# Altium PCB ADAS_ECU_MB_revA.PcbDoc (part 1 of 5)
Units mm, origin at the board's own origin, x right, y up, seen from the top; angles counter-clockwise.
Board outline 180 x 120 mm, 6 copper layers (Top Layer, Mid Layer 1, Mid Layer 2, Mid Layer 3, Mid Layer 4, Bottom Layer), stack 1.554 mm thick; 452 components, 370 nets, 4018 pads, 80 vias.
Unrouted connection lines stored in the file: 869.
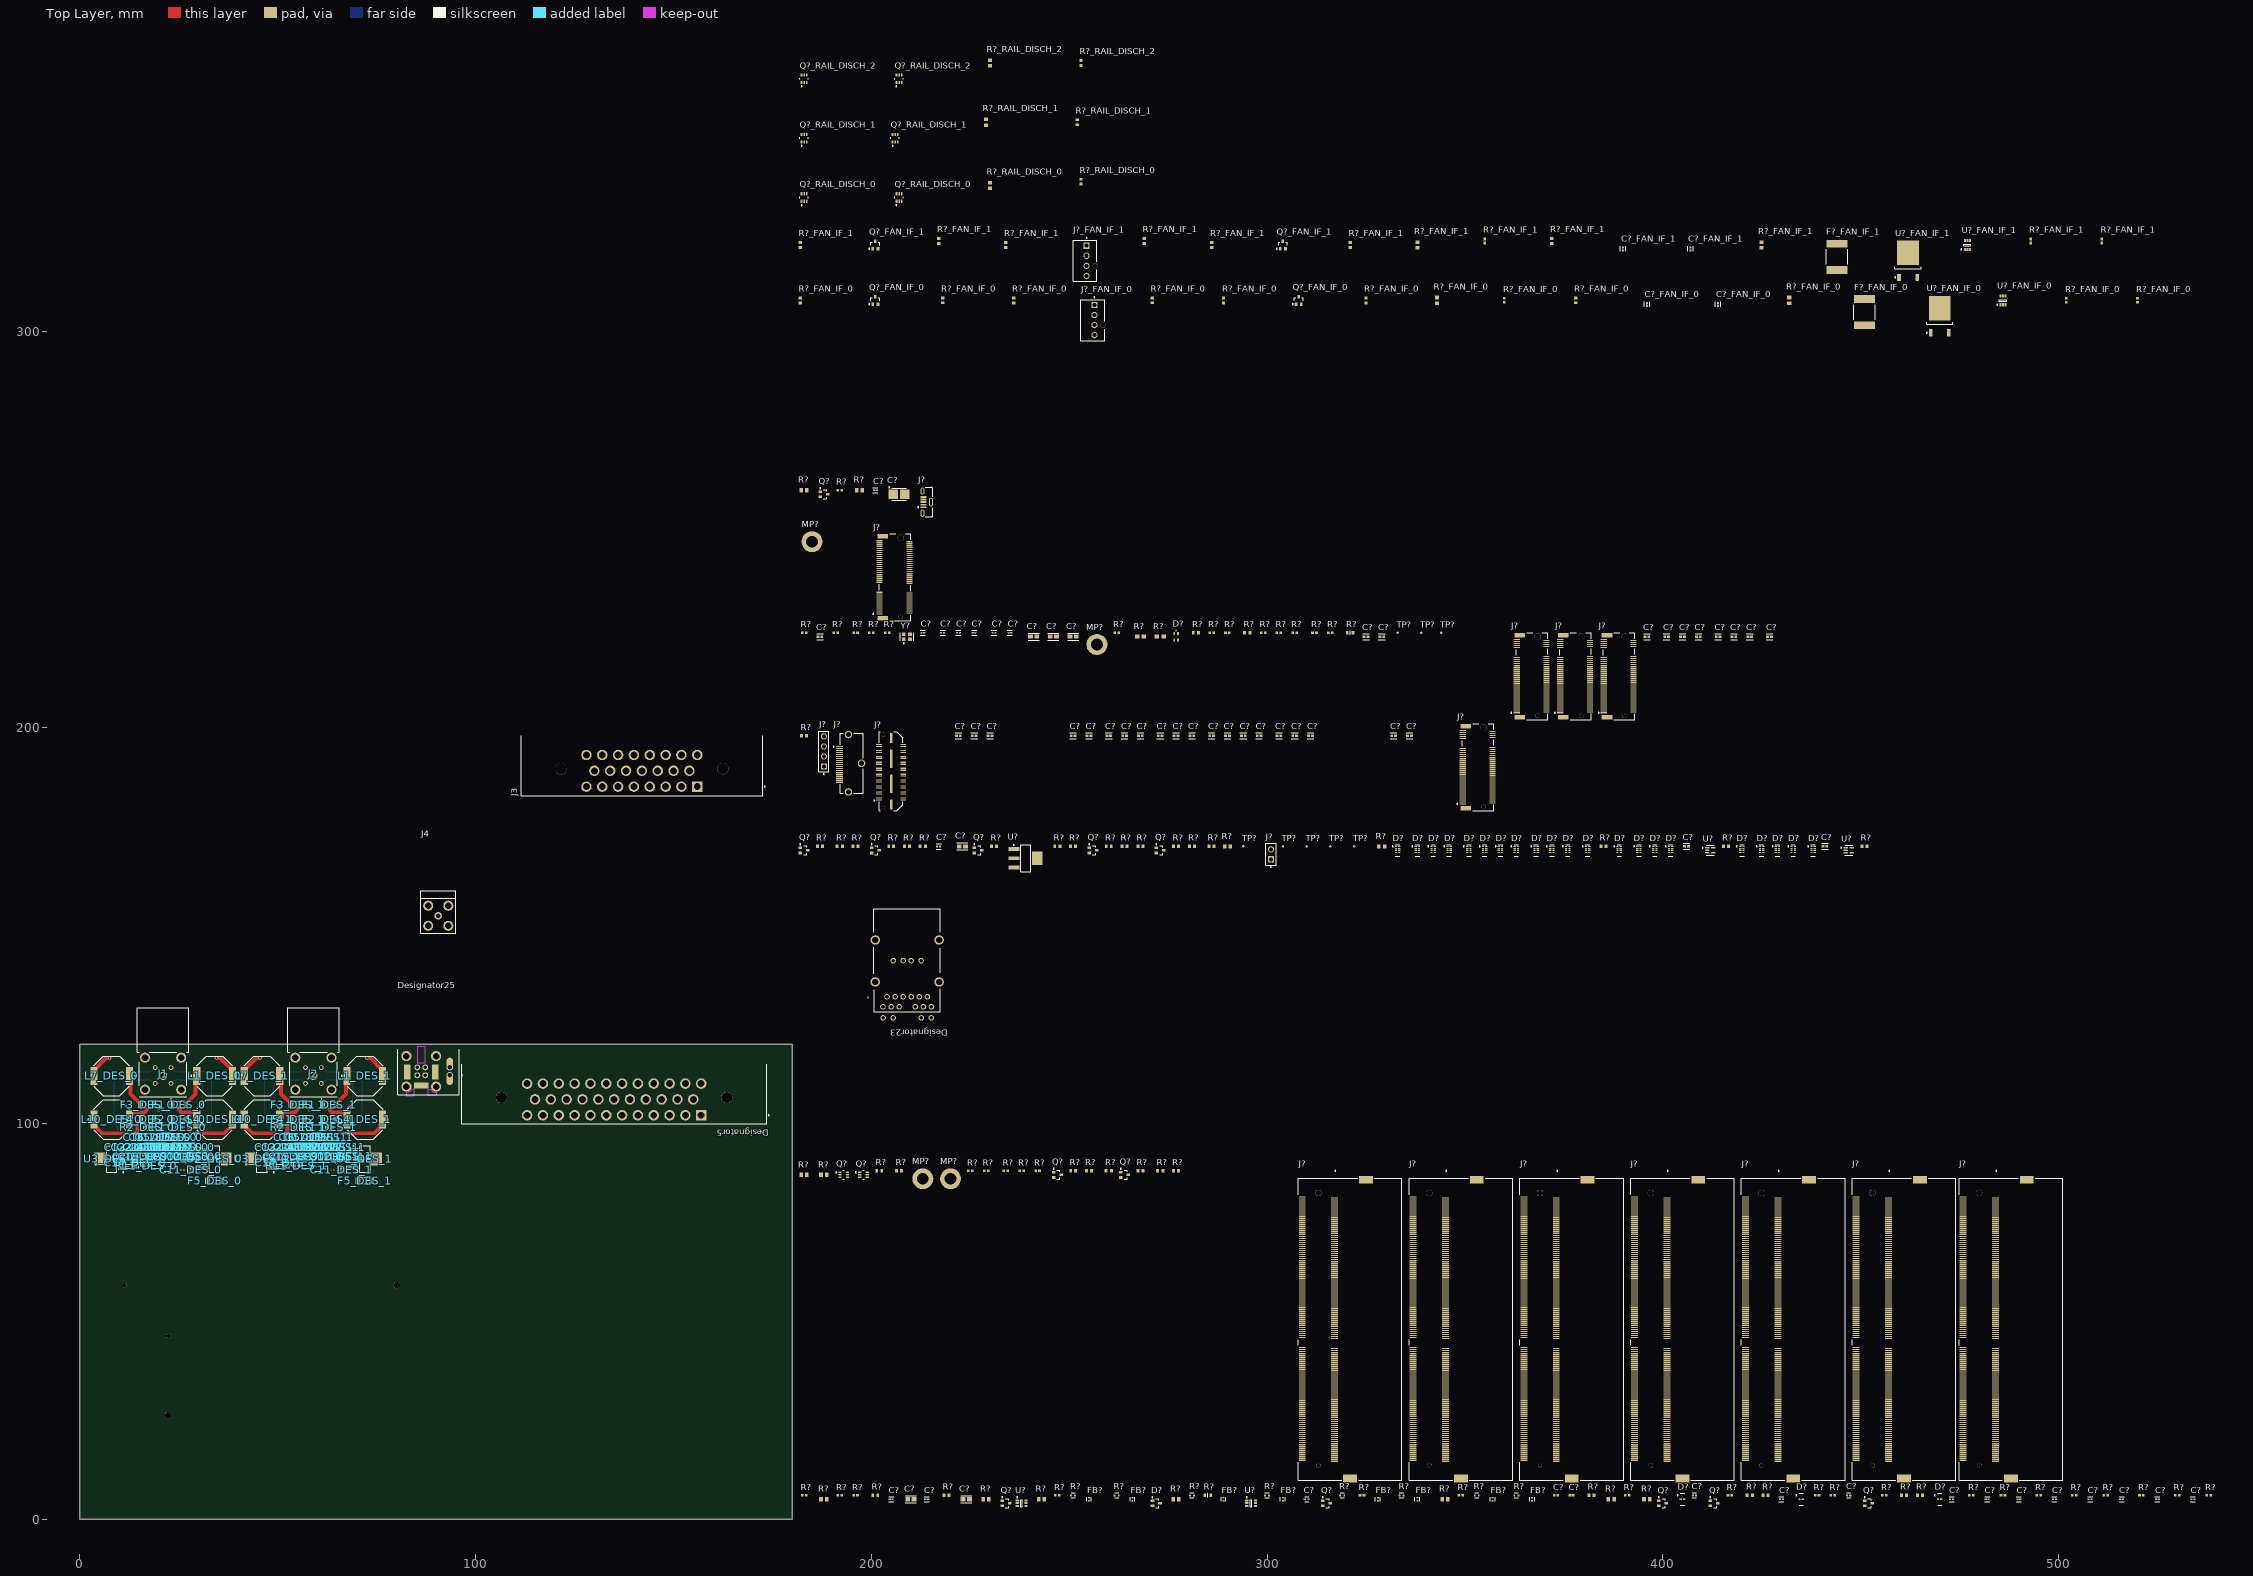
[diagram p0: Top Layer view]
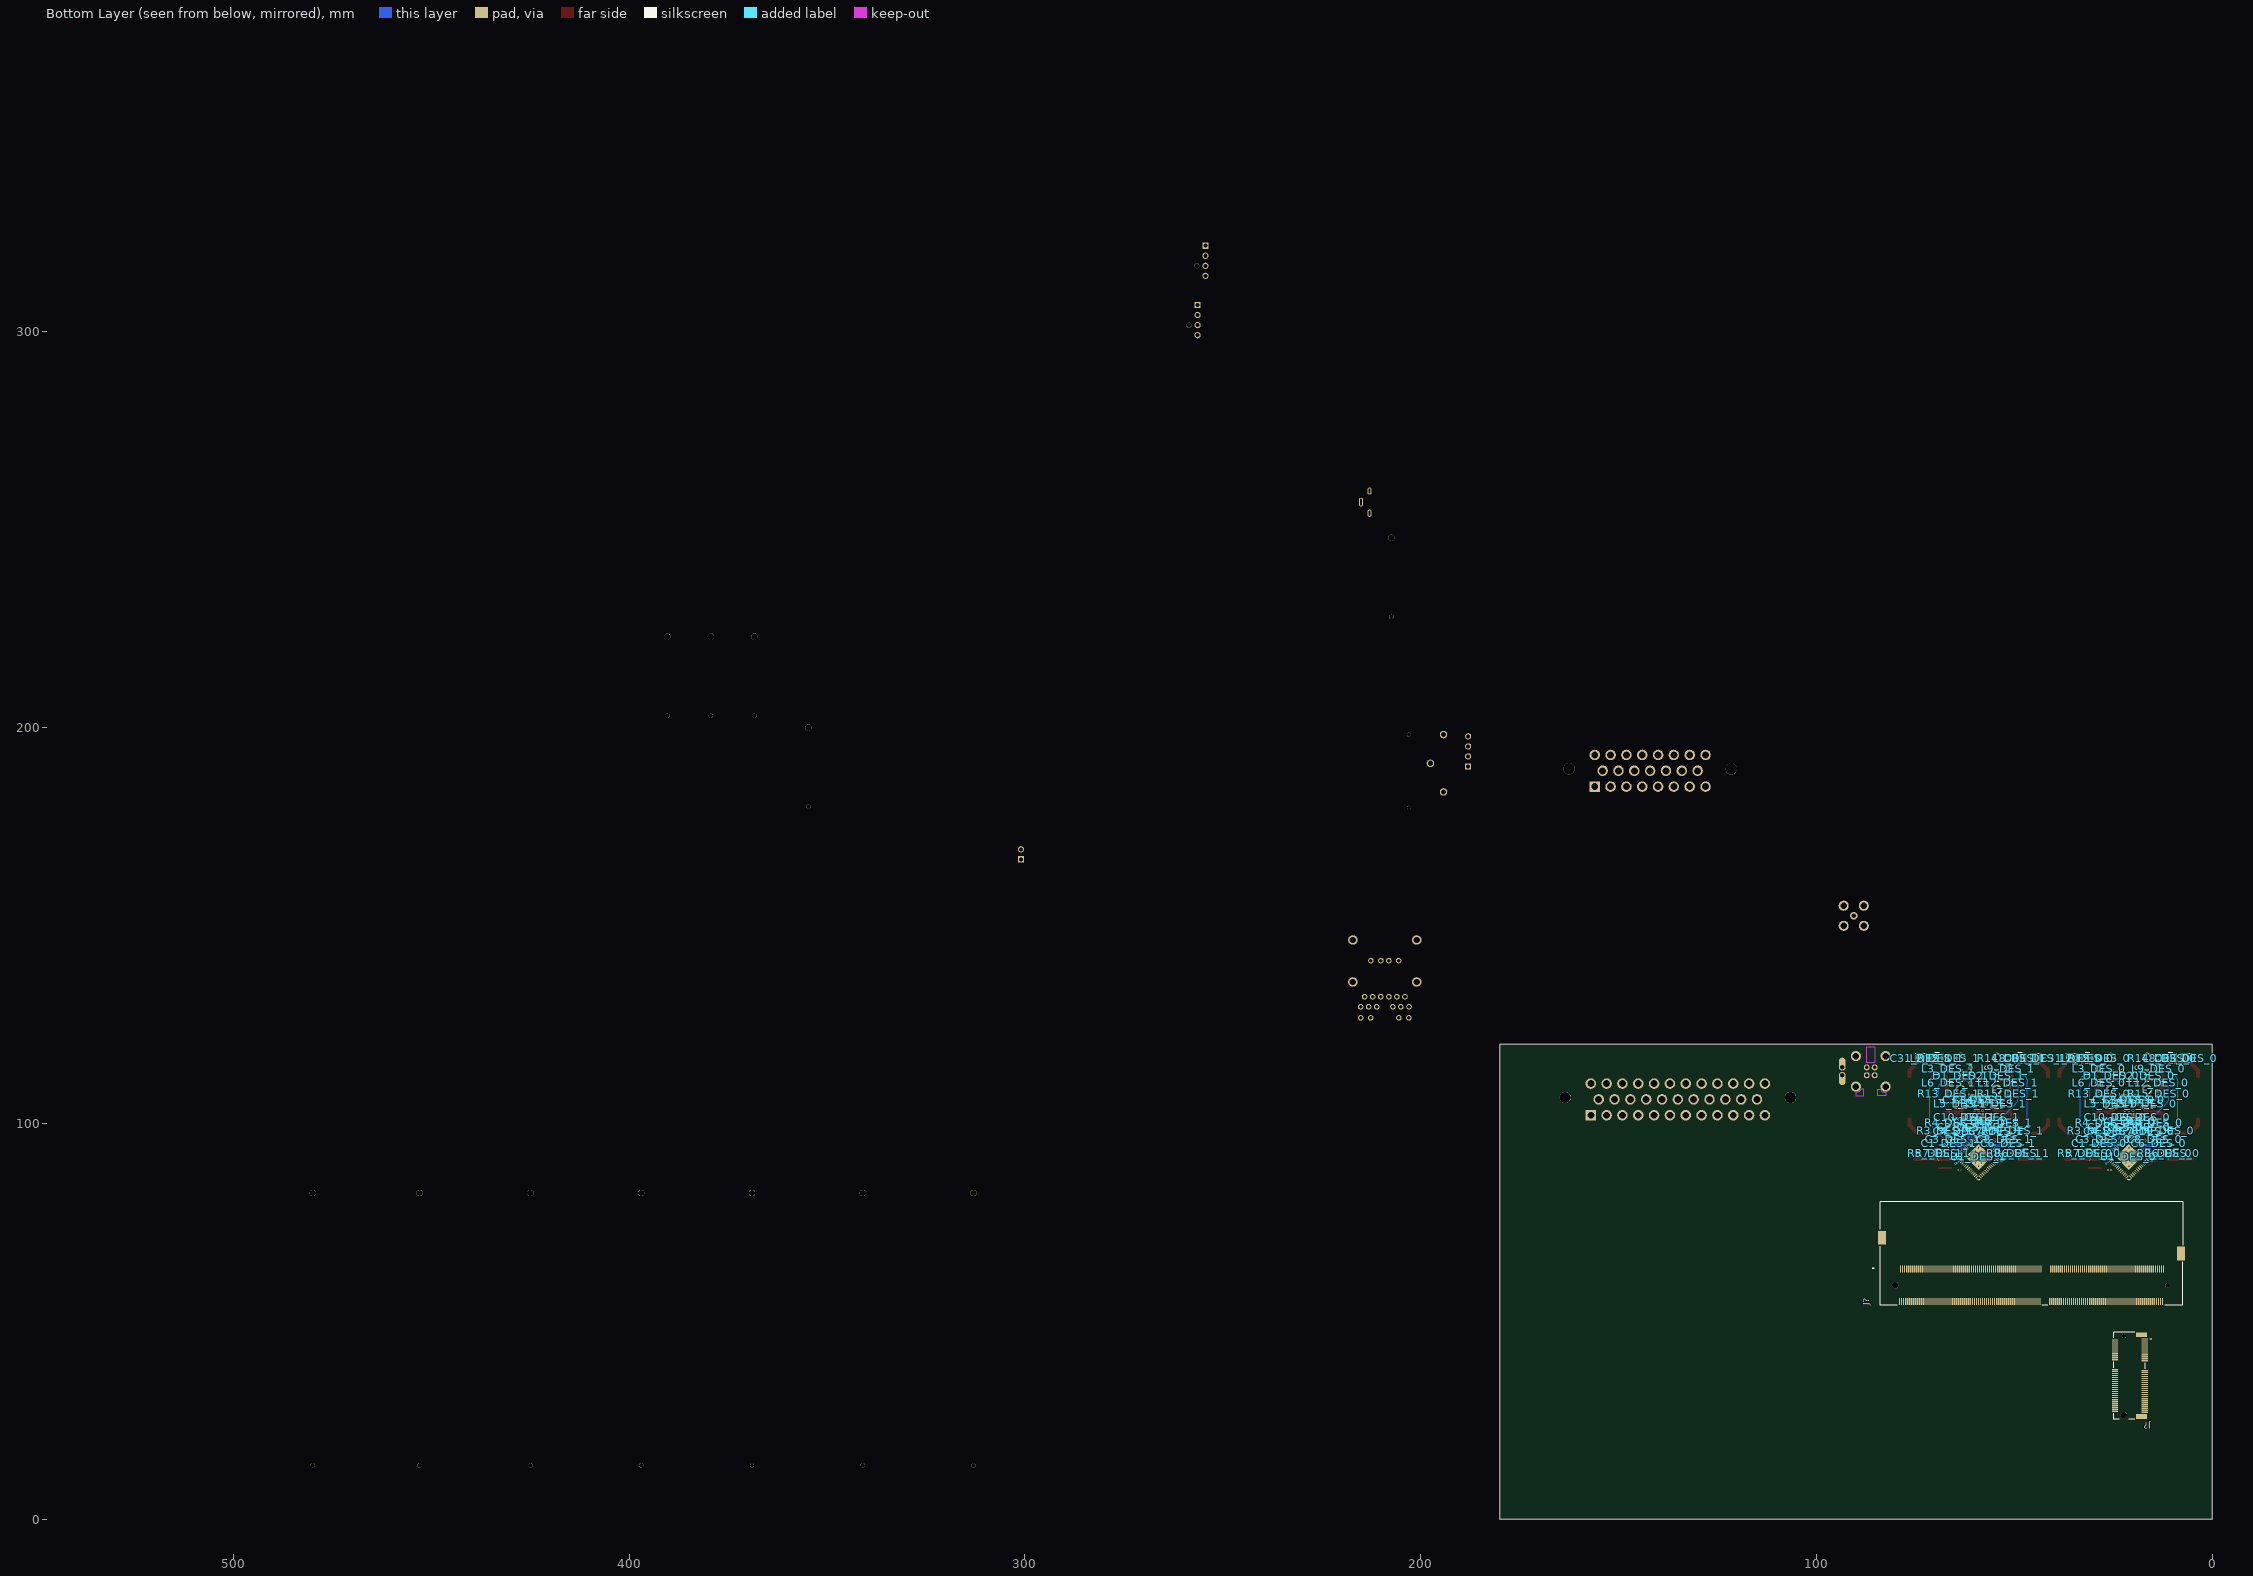
[diagram p1: Bottom Layer view, seen from below]

## Layer stack, top to bottom
Top Solder: solder mask 0.0127, Solder Resist, Dk 3.8
Top Layer: signal copper 0.035
Dielectric 1: prepreg 0.2104, 2313, Dk 4.05
Mid Layer 1: signal copper 0.0152
Core 1: core 0.4, FR-4, Dk 4.5
Mid Layer 2: signal copper 0.0152
Dielectric 2: prepreg 0.2028, 2116, Dk 4.25
Mid Layer 3: signal copper 0.0152
Core 2: core 0.4, FR-4, Dk 4.5
Mid Layer 4: signal copper 0.0152
Dielectric 3: prepreg 0.2104, 2313, Dk 4.05
Bottom Layer: signal copper 0.035
Bottom Solder: solder mask 0.0127, Solder Resist, Dk 3.8

## Board outline
0,0 180,0 180,120 0,120

## Design rules (kind name [scope] priority, off if disabled: settings)
BoardOutlineClearance [All] p1: gap=0.2 ignorepadtopadclearanceinfootprint=FALSE
Clearance [All] p1: gap=0.089 ignorepadtopadclearanceinfootprint=FALSE except(0.127: Arc-Via Track-Via SMDPad-Via THPad-Via Via-Via Via-Fill Via-Poly Via-Region Via-Text; 0.25: Arc-Hole Track-Hole SMDPad-Hole THPad-Hole Via-Hole Fill-Hole Poly-Hole Region-Hole Text-Hole)
ComponentClearance [All] p1: gap=0.089 collisioncheckmode=3 verticalgap=0.089 showdistances=TRUE
DiffPairsRouting 100DIFF [InDifferentialPairClass('100DIFF')] p1: maxlimit=0.2 minlimit=0.127 mostfreqgap=0.127 toplayer_mingap=0.2 toplayer_prefgap=0.2 toplayer_minwidth=0.163 toplayer_maxwidth=0.163 toplayer_prefwidth=0.163 midlayer1_maxgap=0.127 midlayer1_minwidth=0.101 midlayer1_maxwidth=0.101 midlayer1_prefwidth=0.101 midlayer2_maxgap=0.127 midlayer2_minwidth=0.096 midlayer2_maxwidth=0.096 midlayer2_prefwidth=0.096 midlayer3_maxgap=0.127 midlayer3_minwidth=0.096 midlayer3_maxwidth=0.096 midlayer3_prefwidth=0.096 midlayer4_maxgap=0.127 midlayer4_minwidth=0.101 midlayer4_maxwidth=0.101 midlayer4_prefwidth=0.101 bottomlayer_mingap=0.2 bottomlayer_prefgap=0.2 bottomlayer_minwidth=0.163 bottomlayer_maxwidth=0.163 bottomlayer_prefwidth=0.163 impedanceprofiledriven=TRUE impedanceprofileid={C7A9BCC2-5C8B-45AC-9D52-E18A9F04167A} impedanceprofilevalue=100.000000 maxuncoupledlength=12.7
DiffPairsRouting 90DIFF [InDifferentialPairClass('90DIFF')] p2: maxlimit=0.2 minlimit=0.127 mostfreqgap=0.127 toplayer_mingap=0.2 toplayer_prefgap=0.2 toplayer_minwidth=0.222 toplayer_maxwidth=0.222 toplayer_prefwidth=0.222 midlayer1_maxgap=0.127 midlayer1_minwidth=0.141 midlayer1_maxwidth=0.141 midlayer1_prefwidth=0.141 midlayer2_maxgap=0.127 midlayer2_minwidth=0.134 midlayer2_maxwidth=0.134 midlayer2_prefwidth=0.134 midlayer3_maxgap=0.127 midlayer3_minwidth=0.134 midlayer3_maxwidth=0.134 midlayer3_prefwidth=0.134 midlayer4_maxgap=0.127 midlayer4_minwidth=0.141 midlayer4_maxwidth=0.141 midlayer4_prefwidth=0.141 bottomlayer_mingap=0.2 bottomlayer_prefgap=0.2 bottomlayer_minwidth=0.222 bottomlayer_maxwidth=0.222 bottomlayer_prefwidth=0.222 impedanceprofiledriven=TRUE impedanceprofileid={3FA04896-F24A-4C4C-8FE7-887AC91E8F2A} impedanceprofilevalue=90.000000 maxuncoupledlength=12.7
DiffPairsRouting 85DIFF [InDifferentialPairClass('85DIFF')] p3: maxlimit=0.2 minlimit=0.127 mostfreqgap=0.127 toplayer_mingap=0.2 toplayer_prefgap=0.2 toplayer_minwidth=0.259 toplayer_maxwidth=0.259 toplayer_prefwidth=0.259 midlayer1_maxgap=0.127 midlayer1_minwidth=0.166 midlayer1_maxwidth=0.166 midlayer1_prefwidth=0.166 midlayer2_maxgap=0.127 midlayer2_minwidth=0.159 midlayer2_maxwidth=0.159 midlayer2_prefwidth=0.159 midlayer3_maxgap=0.127 midlayer3_minwidth=0.159 midlayer3_maxwidth=0.159 midlayer3_prefwidth=0.159 midlayer4_maxgap=0.127 midlayer4_minwidth=0.166 midlayer4_maxwidth=0.166 midlayer4_prefwidth=0.166 bottomlayer_mingap=0.2 bottomlayer_prefgap=0.2 bottomlayer_minwidth=0.259 bottomlayer_maxwidth=0.259 bottomlayer_prefwidth=0.259 impedanceprofiledriven=TRUE impedanceprofileid={6529A067-EDCB-4022-8723-74E45307CAC3} impedanceprofilevalue=85.000000 maxuncoupledlength=12.7
DiffPairsRouting [All] p4: maxlimit=0.089 minlimit=0.089 mostfreqgap=0.089 toplayer_minwidth=0.089 toplayer_maxwidth=1816.048 toplayer_prefwidth=0.089 midlayer1_minwidth=0.089 midlayer1_maxwidth=1816.048 midlayer1_prefwidth=0.089 midlayer2_minwidth=0.089 midlayer2_maxwidth=1816.048 midlayer2_prefwidth=0.089 midlayer3_minwidth=0.089 midlayer3_maxwidth=1816.048 midlayer3_prefwidth=0.089 midlayer4_minwidth=0.089 midlayer4_maxwidth=1816.048 midlayer4_prefwidth=0.089 bottomlayer_minwidth=0.089 bottomlayer_maxwidth=1816.048 bottomlayer_prefwidth=0.089 maxuncoupledlength=12.7
Height [All] p1: minheight=0 maxheight=1816.048 prefheight=12.7
HoleSize [All] p1: absolutevalues=TRUE maxlimit=6.3 minlimit=0.2 maxpercent=80.000 minpercent=20.000
HoleToHoleClearance [All] p1: gap=0.25 allowstackedmicrovias=FALSE
MinimumAnnularRing [All] p1: minimumring=0.076
MinimumSolderMaskSliver [All] p1: minsoldermaskwidth=0
PlaneClearance [All] p1: clearance=0.089
PlaneConnect PlaneConnectPowerPads [InPadClass('PowerPads')] p1: planeconnectstyle=Direct reliefexpansion=0.508 reliefentries=4 reliefconductorwidth=0.254 reliefairgap=0.254
PlaneConnect [All] p2: pad.planeconnectstyle=Relief pad.reliefexpansion=0.3 pad.reliefentries=4 pad.reliefconductorwidth=0.089 pad.reliefairgap=0.089 via.planeconnectstyle=Direct via.reliefexpansion=0.3 via.reliefentries=4 via.reliefconductorwidth=0.127 via.reliefairgap=0.127
PolygonConnect PolygonConnectPowerPads [All vs (InPadClass('PowerPads'))] p1: connectstyle=Direct reliefconductorwidth=0.254 reliefentries=4 polygonreliefangle="90 Angle" airgapwidth=0.254
PolygonConnect [All] p2: thpad.connectstyle=Relief thpad.reliefconductorwidth=0.089 thpad.reliefentries=4 thpad.polygonreliefangle="90 Angle" thpad.airgapwidth=0.089 smdpad.connectstyle=Relief smdpad.reliefconductorwidth=0.089 smdpad.reliefentries=4 smdpad.polygonreliefangle="90 Angle" smdpad.airgapwidth=0.089 via.connectstyle=Direct via.reliefconductorwidth=0.127 via.reliefentries=4 via.polygonreliefangle="90 Angle" via.airgapwidth=0.127
RoomDefinition DES_0 [InComponentClass('DES_0')] p1: confinementstyle=ConfineIn formatcopy=TRUE lockcomponents=FALSE outline 2,84 40,84 40,131 2,131
RoomDefinition DES_1 [InComponentClass('DES_1')] p2: confinementstyle=ConfineIn formatcopy=TRUE lockcomponents=FALSE outline 40,84 78,84 78,131 40,131
RoutingVias [All] p1: holewidth=0.2 width=0.45 viastyle="Through Hole" minholewidth=0.2 minwidth=0.45 maxholewidth=6.3 maxwidth=6.55
SilkToSilkClearance [All] p1: silktosilkclearance=0
SilkToSolderMaskClearance [IsPad] p1: minsilkscreentomaskgap=0.089 clearancetoexposedcopper=TRUE
SolderMaskExpansion [All] p1: expansion=0.075 istentingtop=FALSE
SupplyNets "Schematic Supply Nets_2" [InNet('DES_3V3_DES_0')] p1: voltage=0.000
SupplyNets "Schematic Supply Nets_9" [InNet('WIFI_3V3')] p2: voltage=0.000
SupplyNets "Schematic Supply Nets_8" [InNet('RAIL_RAIL_DISCH_2')] p3: voltage=0.000
SupplyNets "Schematic Supply Nets_7" [InNet('GND')] p4: voltage=0.000
SupplyNets "Schematic Supply Nets_6" [InNet('RAIL_RAIL_DISCH_1')] p5: voltage=0.000
SupplyNets "Schematic Supply Nets_5" [InNet('INT_VCC')] p6: voltage=0.000
SupplyNets "Schematic Supply Nets_3" [InNet('5V_MAIN')] p7: voltage=0.000
SupplyNets "Schematic Supply Nets_1" [InNet('FAN_VDDIO_FAN_IF_0')] p8: voltage=0.000
SupplyNets "Schematic Supply Nets" [InNet('RAIL_RAIL_DISCH_0')] p9: voltage=0.000
Width 50SINGLE [InNetClass('50SINGLE')] p1: maxlimit=0.199 minlimit=0.17 preferedwidth=0.18 toplayer_minwidth=0.199 toplayer_prefwidth=0.199 midlayer1_minwidth=0.18 midlayer1_maxwidth=0.18 midlayer2_maxwidth=0.17 midlayer2_prefwidth=0.17 midlayer3_maxwidth=0.17 midlayer3_prefwidth=0.17 midlayer4_minwidth=0.18 midlayer4_maxwidth=0.18 bottomlayer_minwidth=0.199 bottomlayer_prefwidth=0.199 impedanceprofiledriven=TRUE impedanceprofileid={5E629595-9142-4542-B4F5-3DDBBC1C75C9} impedanceprofilevalue=50.000000 minimp=50.000000 maximp=50.000000 favimp=50.000000
Width [All] p2: maxlimit=1816.048 minlimit=0.089 preferedwidth=0.089
20 further rules are at their usual default settings.

## Classes and differential pairs
component class REC_USB_0: C? J? Q? R?
component class HDMI_0: C? D? FB? Q? R? U?
component class NVME_0: C? D? J? MP? R? TP? Y?
component class MAIN_BOARD: C? J1 J2 J4 J? R?
component class NVME_1: J? MP?
component class JETSON: C? D? J? MP? Q? R? TP? U?
differential pair class CSI1: CKB_DES_0 CKB_DES_1 CKB_DES_2 DB0_DES_0 DB0_DES_1 DB0_DES_2 DB1_DES_0 DB1_DES_1 DB1_DES_2 DB2_DES_0 DB2_DES_1 DB2_DES_2 DB3_DES_0 DB3_DES_1 DB3_DES_2
differential pair class CSI1_PRE: CKB_DES_0 CKB_DES_1 CKB_DES_2 DB0_DES_0 DB0_DES_1 DB0_DES_2 DB1_DES_0 DB1_DES_1 DB1_DES_2 DB2_DES_0 DB2_DES_1 DB2_DES_2 DB3_DES_0 DB3_DES_1 DB3_DES_2
differential pair class CSI0: CKA_DES_0 CKA_DES_1 CKA_DES_2 DA0_DES_0 DA0_DES_1 DA0_DES_2 DA1_DES_0 DA1_DES_1 DA1_DES_2 DA2_DES_0 DA2_DES_1 DA2_DES_2 DA3_DES_0 DA3_DES_1 DA3_DES_2
differential pair class CSI0_PRE: CKC_DES_0 CKC_DES_1 CKC_DES_2 DA0_DES_0 DA0_DES_1 DA0_DES_2 DA1_DES_0 DA1_DES_1 DA1_DES_2 DA2_DES_0 DA2_DES_1 DA2_DES_2 DA3_DES_0 DA3_DES_1 DA3_DES_2
differential pair class 100DIFF: DP1_TXD0 DP1_TXD1 DP1_TXD2 DP1_TXD3 GBE_MDI0 GBE_MDI1 GBE_MDI2 GBE_MDI3 HDMI_CLK HDMI_D0 HDMI_D1 HDMI_D2 PRE_CSI0_D1 PRE_CSI1_D0 SIO_SER_0 SIO_SER_1 SIOA_DES_0 SIOA_DES_1 SIOA_DES_2 SIOB_DES_0 SIOB_DES_1 SIOB_DES_2 SIOC_DES_0 SIOC_DES_1 SIOC_DES_2 SIOD_DES_0 SIOD_DES_1 SIOD_DES_2
differential pair class 90DIFF: USB0_D USB1_D
differential pair class 85DIFF: PCIE0_CLK PCIE0_RX0 PCIE0_RX1 PCIE0_RX2 PCIE0_RX3 PCIE0_TX0 PCIE0_TX1 PCIE0_TX2 PCIE0_TX3 PCIE_RX0 PCIE_RX1 PCIE_RX2 PCIE_RX3 PRE_CLK PRE_TX0 PRE_TX1 PRE_TX2 PRE_TX3 USBSS0_RX USBSS0_TX
channel class RAIL_DISCHARGE: RAIL_DISCH_0 RAIL_DISCH_1 RAIL_DISCH_2
channel class GMSL_DESERIALIZER: DES_0 DES_1
channel class FAN_IF: FAN_IF_0 FAN_IF_1
net class PWR: NetC31_DES_0_1 NetC31_DES_1_1 NetC32_DES_0_1 NetC32_DES_1_1 NetC33_DES_0_1 NetC33_DES_1_1 NetC34_DES_0_1 NetC34_DES_1_1 NetF1_DES_0_2 NetF1_DES_1_2 NetF2_DES_0_2 NetF2_DES_1_2 NetF3_DES_0_2 NetF3_DES_1_2 NetF4_DES_0_2 NetF4_DES_1_2 NetL2_DES_0_2 NetL2_DES_1_2 NetL5_DES_0_2 NetL5_DES_1_2 NetL8_DES_0_2 NetL8_DES_1_2 NetL11_DES_0_2 NetL11_DES_1_2 PoC_PWR_DES_0 PoC_PWR_DES_1
net class 100DIFF: CSI0_CLK_N CSI0_CLK_P CSI0_D0_N CSI0_D0_P CSI0_D1_N CSI0_D1_P CSI1_D0_N CSI1_D0_P CSI1_D1_N CSI1_D1_P CSI2_CLK_N CSI2_CLK_P CSI2_D0_N CSI2_D0_P CSI2_D1_N CSI2_D1_P CSI3_D0_N CSI3_D0_P CSI3_D1_N CSI3_D1_P DP1_TXD0_N DP1_TXD0_P DP1_TXD1_N DP1_TXD1_P DP1_TXD2_N DP1_TXD2_P DP1_TXD3_N DP1_TXD3_P DP_D0_N DP_D0_P DP_D1_N DP_D1_P DP_D2_N DP_D2_P DP_D3_N DP_D3_P GBE_MDI0_N GBE_MDI0_P GBE_MDI1_N GBE_MDI1_P GBE_MDI2_N GBE_MDI2_P GBE_MDI3_N GBE_MDI3_P HDMI_CLK_N HDMI_CLK_P HDMI_D0_N HDMI_D0_P HDMI_D1_N HDMI_D1_P HDMI_D2_N HDMI_D2_P PLDWN_1 PLDWN_2 PLDWN_3 PLDWN_4 PLDWN_5 PLDWN_6 PLDWN_7 PLDWN_8 PRE_CSI0_D1_N PRE_CSI0_D1_P PRE_CSI1_D0_N PRE_CSI1_D0_P
net class 90DIFF: USB0_D_N USB0_D_P USB1_D_N USB1_D_P
net class 85DIFF: PCIE0_CLK_N PCIE0_CLK_P PCIE0_RX0_N PCIE0_RX0_P PCIE0_RX1_N PCIE0_RX1_P PCIE0_RX2_N PCIE0_RX2_P PCIE0_RX3_N PCIE0_RX3_P PCIE0_TX0_N PCIE0_TX0_P PCIE0_TX1_N PCIE0_TX1_P PCIE0_TX2_N PCIE0_TX2_P PCIE0_TX3_N PCIE0_TX3_P PCIE_RX0_N PCIE_RX0_P PCIE_RX1_N PCIE_RX1_P PCIE_RX2_N PCIE_RX2_P PCIE_RX3_N PCIE_RX3_P PRE_CLK_N PRE_CLK_P PRE_TX0_N PRE_TX0_P PRE_TX1_N PRE_TX1_P PRE_TX2_N PRE_TX2_P PRE_TX3_N PRE_TX3_P USBSS0_RX_N USBSS0_RX_P USBSS0_TX_N USBSS0_TX_P
net class 50SINGLE: NetC3_DES_0_2 NetC3_DES_1_2 NetC4_DES_0_2 NetC4_DES_1_2 NetC7_DES_0_2 NetC7_DES_1_2 NetC8_DES_0_2 NetC8_DES_1_2 PoC_A_DES_0 PoC_A_DES_1 PoC_B_DES_0 PoC_B_DES_1 PoC_C_DES_0 PoC_C_DES_1 PoC_D_DES_0 PoC_D_DES_1
net class 45SINGLE: USB0_D_N USB0_D_P
component class RAIL_DISCH_2: Q?_RAIL_DISCH_2 R?_RAIL_DISCH_2
component class RAIL_DISCH_1: Q?_RAIL_DISCH_1 R?_RAIL_DISCH_1
component class RAIL_DISCH_0: Q?_RAIL_DISCH_0 R?_RAIL_DISCH_0
component class FAN_IF_1: C?_FAN_IF_1 F?_FAN_IF_1 J?_FAN_IF_1 Q?_FAN_IF_1 R?_FAN_IF_1 U?_FAN_IF_1
component class FAN_IF_0: C?_FAN_IF_0 F?_FAN_IF_0 J?_FAN_IF_0 Q?_FAN_IF_0 R?_FAN_IF_0 U?_FAN_IF_0
component class DES_1: C1_DES_1 C2_DES_1 C3_DES_1 C4_DES_1 C5_DES_1 C6_DES_1 C7_DES_1 C8_DES_1 C9_DES_1 C10_DES_1 C11_DES_1 C12_DES_1 C13_DES_1 C14_DES_1 C15_DES_1 C16_DES_1 C17_DES_1 C18_DES_1 C19_DES_1 C20_DES_1 C21_DES_1 C22_DES_1 C23_DES_1 C24_DES_1 C25_DES_1 C26_DES_1 C27_DES_1 C28_DES_1 C29_DES_1 C30_DES_1 C31_DES_1 C32_DES_1 C33_DES_1 C34_DES_1 D1_DES_1 D2_DES_1 F1_DES_1 F2_DES_1 F3_DES_1 F4_DES_1 F5_DES_1 L1_DES_1 L2_DES_1 L3_DES_1 L4_DES_1 L5_DES_1 L6_DES_1 L7_DES_1 L8_DES_1 L9_DES_1 L10_DES_1 L11_DES_1 L12_DES_1 R1_DES_1 R2_DES_1 R3_DES_1 R4_DES_1 R5_DES_1 R6_DES_1 R7_DES_1 R8_DES_1 R9_DES_1 R10_DES_1 R11_DES_1 R12_DES_1 R13_DES_1 R14_DES_1 R15_DES_1 U1_DES_1 U2_DES_1 U3_DES_1 Y1_DES_1
component class DES_0: C1_DES_0 C2_DES_0 C3_DES_0 C4_DES_0 C5_DES_0 C6_DES_0 C7_DES_0 C8_DES_0 C9_DES_0 C10_DES_0 C11_DES_0 C12_DES_0 C13_DES_0 C14_DES_0 C15_DES_0 C16_DES_0 C17_DES_0 C18_DES_0 C19_DES_0 C20_DES_0 C21_DES_0 C22_DES_0 C23_DES_0 C24_DES_0 C25_DES_0 C26_DES_0 C27_DES_0 C28_DES_0 C29_DES_0 C30_DES_0 C31_DES_0 C32_DES_0 C33_DES_0 C34_DES_0 D1_DES_0 D2_DES_0 F1_DES_0 F2_DES_0 F3_DES_0 F4_DES_0 F5_DES_0 L1_DES_0 L2_DES_0 L3_DES_0 L4_DES_0 L5_DES_0 L6_DES_0 L7_DES_0 L8_DES_0 L9_DES_0 L10_DES_0 L11_DES_0 L12_DES_0 R1_DES_0 R2_DES_0 R3_DES_0 R4_DES_0 R5_DES_0 R6_DES_0 R7_DES_0 R8_DES_0 R9_DES_0 R10_DES_0 R11_DES_0 R12_DES_0 R13_DES_0 R14_DES_0 R15_DES_0 U1_DES_0 U2_DES_0 U3_DES_0 Y1_DES_0
differential pair X25_DES_1: +X25_DES_1_P -X25_DES_1_N
differential pair X25_DES_0: +X25_DES_0_P -X25_DES_0_N
differential pair USBSS0_TX: +USBSS0_TX_P -USBSS0_TX_N
differential pair USBSS0_RX: +USBSS0_RX_P -USBSS0_RX_N
differential pair USB1_D: +USB1_D_P -USB1_D_N
differential pair USB0_D: +USB0_D_P -USB0_D_N
differential pair SIOD_DES_1: +SIOD_DES_1_P -SIOD_DES_1_N
differential pair SIOD_DES_0: +SIOD_DES_0_P -SIOD_DES_0_N
differential pair SIOC_DES_1: +SIOC_DES_1_P -SIOC_DES_1_N
differential pair SIOC_DES_0: +SIOC_DES_0_P -SIOC_DES_0_N
differential pair SIOB_DES_1: +SIOB_DES_1_P -SIOB_DES_1_N
differential pair SIOB_DES_0: +SIOB_DES_0_P -SIOB_DES_0_N
differential pair SIOA_DES_1: +SIOA_DES_1_P -SIOA_DES_1_N
differential pair SIOA_DES_0: +SIOA_DES_0_P -SIOA_DES_0_N
differential pair PRE_TX3: +PRE_TX3_P -PRE_TX3_N
differential pair PRE_TX2: +PRE_TX2_P -PRE_TX2_N
differential pair PRE_TX1: +PRE_TX1_P -PRE_TX1_N
differential pair PRE_TX0: +PRE_TX0_P -PRE_TX0_N
differential pair PRE_CSI1_D0: +PRE_CSI1_D0_P -PRE_CSI1_D0_N
differential pair PRE_CSI0_D1: +PRE_CSI0_D1_P -PRE_CSI0_D1_N
differential pair PRE_CLK: +PRE_CLK_P -PRE_CLK_N
differential pair PCIE_RX3: +PCIE_RX3_P -PCIE_RX3_N
differential pair PCIE_RX2: +PCIE_RX2_P -PCIE_RX2_N
differential pair PCIE_RX1: +PCIE_RX1_P -PCIE_RX1_N
differential pair PCIE_RX0: +PCIE_RX0_P -PCIE_RX0_N
differential pair PCIE0_TX3: +PCIE0_TX3_P -PCIE0_TX3_N
differential pair PCIE0_TX2: +PCIE0_TX2_P -PCIE0_TX2_N
differential pair PCIE0_TX1: +PCIE0_TX1_P -PCIE0_TX1_N
differential pair PCIE0_TX0: +PCIE0_TX0_P -PCIE0_TX0_N
differential pair PCIE0_RX3: +PCIE0_RX3_P -PCIE0_RX3_N
differential pair PCIE0_RX2: +PCIE0_RX2_P -PCIE0_RX2_N
differential pair PCIE0_RX1: +PCIE0_RX1_P -PCIE0_RX1_N
differential pair PCIE0_RX0: +PCIE0_RX0_P -PCIE0_RX0_N
differential pair PCIE0_CLK: +PCIE0_CLK_P -PCIE0_CLK_N
differential pair HDMI_D2: +HDMI_D2_P -HDMI_D2_N
differential pair HDMI_D1: +HDMI_D1_P -HDMI_D1_N
differential pair HDMI_D0: +HDMI_D0_P -HDMI_D0_N
differential pair HDMI_CLK: +HDMI_CLK_P -HDMI_CLK_N
differential pair GBE_MDI3: +GBE_MDI3_P -GBE_MDI3_N
differential pair GBE_MDI2: +GBE_MDI2_P -GBE_MDI2_N
differential pair GBE_MDI1: +GBE_MDI1_P -GBE_MDI1_N
differential pair GBE_MDI0: +GBE_MDI0_P -GBE_MDI0_N
differential pair DP1_TXD3: +DP1_TXD3_P -DP1_TXD3_N
differential pair DP1_TXD2: +DP1_TXD2_P -DP1_TXD2_N
differential pair DP1_TXD1: +DP1_TXD1_P -DP1_TXD1_N
differential pair DP1_TXD0: +DP1_TXD0_P -DP1_TXD0_N
differential pair DP1_AUX: +DP1_AUX_P -DP1_AUX_N
differential pair DB3_DES_1: +DB3_DES_1_P -DB3_DES_1_N
differential pair DB3_DES_0: +DB3_DES_0_P -DB3_DES_0_N
differential pair DB2_DES_1: +DB2_DES_1_P -DB2_DES_1_N
differential pair DB2_DES_0: +DB2_DES_0_P -DB2_DES_0_N
differential pair DB1_DES_1: +DB1_DES_1_P -DB1_DES_1_N
differential pair DB1_DES_0: +DB1_DES_0_P -DB1_DES_0_N
differential pair DB0_DES_1: +DB0_DES_1_P -DB0_DES_1_N
differential pair DB0_DES_0: +DB0_DES_0_P -DB0_DES_0_N
differential pair DA3_DES_1: +DA3_DES_1_P -DA3_DES_1_N
differential pair DA3_DES_0: +DA3_DES_0_P -DA3_DES_0_N
differential pair DA2_DES_1: +DA2_DES_1_P -DA2_DES_1_N
differential pair DA2_DES_0: +DA2_DES_0_P -DA2_DES_0_N
differential pair DA1_DES_1: +DA1_DES_1_P -DA1_DES_1_N
differential pair DA1_DES_0: +DA1_DES_0_P -DA1_DES_0_N
differential pair DA0_DES_1: +DA0_DES_1_P -DA0_DES_1_N
differential pair DA0_DES_0: +DA0_DES_0_P -DA0_DES_0_N
differential pair CKB_DES_1: +CKB_DES_1_P -CKB_DES_1_N
differential pair CKB_DES_0: +CKB_DES_0_P -CKB_DES_0_N
differential pair CKA_DES_1: +CKA_DES_1_P -CKA_DES_1_N
differential pair CKA_DES_0: +CKA_DES_0_P -CKA_DES_0_N

## Components (designator, comment, footprint, x,y, rotation, side; value= is the part's Value field where it differs from the comment)
C1_DES_0 "100n" FP-0402-L_1_0_0_05-W_0_5-IPC_A 28.561,94.939 r45 bottom (schematic designator C1)
C1_DES_1 "100n" FP-0402-L_1_0_0_05-W_0_5-IPC_A 66.561,94.939 r45 bottom (schematic designator C1)
C2_DES_0 "100n" FP-0402-L_1_0_0_05-W_0_5-IPC_A 24.439,99.061 r45 bottom (schematic designator C2)
C2_DES_1 "100n" FP-0402-L_1_0_0_05-W_0_5-IPC_A 62.439,99.061 r45 bottom (schematic designator C2)
C3_DES_0 "100n" FP-0402-L_1_0_0_05-W_0_5-IPC_A 27.5,96 r45 bottom (schematic designator C3)
C3_DES_1 "100n" FP-0402-L_1_0_0_05-W_0_5-IPC_A 65.5,96 r45 bottom (schematic designator C3)
C4_DES_0 "100n" FP-0402-L_1_0_0_05-W_0_5-IPC_A 25.5,98 r45 bottom (schematic designator C4)
C4_DES_1 "100n" FP-0402-L_1_0_0_05-W_0_5-IPC_A 63.5,98 r45 bottom (schematic designator C4)
C5_DES_0 "100n" FP-0402-L_1_0_0_05-W_0_5-IPC_A 17.561,99.061 r135 bottom (schematic designator C5)
C5_DES_1 "100n" FP-0402-L_1_0_0_05-W_0_5-IPC_A 55.561,99.061 r135 bottom (schematic designator C5)
C6_DES_0 "100n" FP-0402-L_1_0_0_05-W_0_5-IPC_A 13.439,94.939 r135 bottom (schematic designator C6)
C6_DES_1 "100n" FP-0402-L_1_0_0_05-W_0_5-IPC_A 51.439,94.939 r135 bottom (schematic designator C6)
C7_DES_0 "100n" FP-0402-L_1_0_0_05-W_0_5-IPC_A 16.5,98 r135 bottom (schematic designator C7)
C7_DES_1 "100n" FP-0402-L_1_0_0_05-W_0_5-IPC_A 54.5,98 r135 bottom (schematic designator C7)
C8_DES_0 "100n" FP-0402-L_1_0_0_05-W_0_5-IPC_A 14.5,96 r135 bottom (schematic designator C8)
C8_DES_1 "100n" FP-0402-L_1_0_0_05-W_0_5-IPC_A 52.5,96 r135 bottom (schematic designator C8)
C9_DES_0 "30p" FP-0402-L_1_0_0_05-W_0_5-IPC_A 17.5,101.5 r0 bottom (schematic designator C9)
C9_DES_1 "30p" FP-0402-L_1_0_0_05-W_0_5-IPC_A 55.5,101.5 r0 bottom (schematic designator C9)
C10_DES_0 "30p" FP-0402-L_1_0_0_05-W_0_5-IPC_A 24.5,101.5 r180 bottom (schematic designator C10)
C10_DES_1 "30p" FP-0402-L_1_0_0_05-W_0_5-IPC_A 62.5,101.5 r180 bottom (schematic designator C10)
C11_DES_0 "100n" FP-0402-L_1_0_0_05-W_0_5-IPC_A 28,88.25 r90 top (schematic designator C11)
C11_DES_1 "100n" FP-0402-L_1_0_0_05-W_0_5-IPC_A 66,88.25 r90 top (schematic designator C11)
C12_DES_0 "GRM188R60J106ME47D" FP-GRM188-0_1-e0_2_0_55-IPC_A 28,91.75 r90 top (schematic designator C12)
C12_DES_1 "GRM188R60J106ME47D" FP-GRM188-0_1-e0_2_0_55-IPC_A 66,91.75 r90 top (schematic designator C12)
C13_DES_0 "100n" FP-0402-L_1_0_0_05-W_0_5-IPC_A 14,94 r270 top (schematic designator C13)
C13_DES_1 "100n" FP-0402-L_1_0_0_05-W_0_5-IPC_A 52,94 r270 top (schematic designator C13)
C14_DES_0 "GRM188R60J106ME47D" FP-GRM188-0_1-e0_2_0_55-IPC_A 14,90 r270 top (schematic designator C14)
C14_DES_1 "GRM188R60J106ME47D" FP-GRM188-0_1-e0_2_0_55-IPC_A 52,90 r270 top (schematic designator C14)
C15_DES_0 "10u" FP-0402-L_1_0_0_05-W_0_5-IPC_A 20.25,96.5 r270 top (schematic designator C15)
C15_DES_1 "10u" FP-0402-L_1_0_0_05-W_0_5-IPC_A 58.25,96.5 r270 top (schematic designator C15)
C16_DES_0 "100n" FP-0402-L_1_0_0_05-W_0_5-IPC_A 18.75,96.5 r270 top (schematic designator C16)
C16_DES_1 "100n" FP-0402-L_1_0_0_05-W_0_5-IPC_A 56.75,96.5 r270 top (schematic designator C16)
C17_DES_0 "10u" FP-0402-L_1_0_0_05-W_0_5-IPC_A 21.75,96.5 r270 top (schematic designator C17)
C17_DES_1 "10u" FP-0402-L_1_0_0_05-W_0_5-IPC_A 59.75,96.5 r270 top (schematic designator C17)
C18_DES_0 "100n" FP-0402-L_1_0_0_05-W_0_5-IPC_A 23.25,96.5 r270 top (schematic designator C18)
C18_DES_1 "100n" FP-0402-L_1_0_0_05-W_0_5-IPC_A 61.25,96.5 r270 top (schematic designator C18)
C19_DES_0 "10u" FP-0402-L_1_0_0_05-W_0_5-IPC_A 17.5,91.5 r270 top (schematic designator C19)
C19_DES_1 "10u" FP-0402-L_1_0_0_05-W_0_5-IPC_A 55.5,91.5 r270 top (schematic designator C19)
C20_DES_0 "100n" FP-0402-L_1_0_0_05-W_0_5-IPC_A 16,91.5 r270 top (schematic designator C20)
C20_DES_1 "100n" FP-0402-L_1_0_0_05-W_0_5-IPC_A 54,91.5 r270 top (schematic designator C20)
C21_DES_0 "10u" FP-0402-L_1_0_0_05-W_0_5-IPC_A 17.25,94 r270 top (schematic designator C21)
C21_DES_1 "10u" FP-0402-L_1_0_0_05-W_0_5-IPC_A 55.25,94 r270 top (schematic designator C21)
C22_DES_0 "100n" FP-0402-L_1_0_0_05-W_0_5-IPC_A 15.75,94 r270 top (schematic designator C22)
C22_DES_1 "100n" FP-0402-L_1_0_0_05-W_0_5-IPC_A 53.75,94 r270 top (schematic designator C22)
C23_DES_0 "10u" FP-0402-L_1_0_0_05-W_0_5-IPC_A 20.25,94 r90 top (schematic designator C23)
C23_DES_1 "10u" FP-0402-L_1_0_0_05-W_0_5-IPC_A 58.25,94 r90 top (schematic designator C23)
C24_DES_0 "10n" FP-0402-L_1_0_0_05-W_0_5-IPC_A 18.75,94 r90 top (schematic designator C24)
C24_DES_1 "10n" FP-0402-L_1_0_0_05-W_0_5-IPC_A 56.75,94 r90 top (schematic designator C24)
C25_DES_0 "10u" FP-0402-L_1_0_0_05-W_0_5-IPC_A 21.75,94 r90 top (schematic designator C25)
C25_DES_1 "10u" FP-0402-L_1_0_0_05-W_0_5-IPC_A 59.75,94 r90 top (schematic designator C25)
C26_DES_0 "10n" FP-0402-L_1_0_0_05-W_0_5-IPC_A 23.25,94 r90 top (schematic designator C26)
C26_DES_1 "10n" FP-0402-L_1_0_0_05-W_0_5-IPC_A 61.25,94 r90 top (schematic designator C26)
C27_DES_0 "10u" FP-0402-L_1_0_0_05-W_0_5-IPC_A 24.75,94 r270 top (schematic designator C27)
C27_DES_1 "10u" FP-0402-L_1_0_0_05-W_0_5-IPC_A 62.75,94 r270 top (schematic designator C27)
C28_DES_0 "10n" FP-0402-L_1_0_0_05-W_0_5-IPC_A 26.25,94 r270 top (schematic designator C28)
C28_DES_1 "10n" FP-0402-L_1_0_0_05-W_0_5-IPC_A 64.25,94 r270 top (schematic designator C28)
C29_DES_0 "10u" FP-0402-L_1_0_0_05-W_0_5-IPC_A 24.75,91.5 r270 top (schematic designator C29)
C29_DES_1 "10u" FP-0402-L_1_0_0_05-W_0_5-IPC_A 62.75,91.5 r270 top (schematic designator C29)
C30_DES_0 "10n" FP-0402-L_1_0_0_05-W_0_5-IPC_A 26.25,91.5 r270 top (schematic designator C30)
C30_DES_1 "10n" FP-0402-L_1_0_0_05-W_0_5-IPC_A 64.25,91.5 r270 top (schematic designator C30)
C31_DES_0 "GRM21BR61E226ME44L" FP-GRM21B-0_2-e0_2_0_7-IPC_B 35.5,116.5 r0 bottom (schematic designator C31)
C31_DES_1 "GRM21BR61E226ME44L" FP-GRM21B-0_2-e0_2_0_7-IPC_B 73.5,116.5 r0 bottom (schematic designator C31)
C32_DES_0 "GRM21BR61E226ME44L" FP-GRM21B-0_2-e0_2_0_7-IPC_B 22.25,106 r90 bottom (schematic designator C32)
C32_DES_1 "GRM21BR61E226ME44L" FP-GRM21B-0_2-e0_2_0_7-IPC_B 60.25,106 r90 bottom (schematic designator C32)
C33_DES_0 "GRM21BR61E226ME44L" FP-GRM21B-0_2-e0_2_0_7-IPC_B 6.5,116.5 r180 bottom (schematic designator C33)
C33_DES_1 "GRM21BR61E226ME44L" FP-GRM21B-0_2-e0_2_0_7-IPC_B 44.5,116.5 r180 bottom (schematic designator C33)
C34_DES_0 "GRM21BR61E226ME44L" FP-GRM21B-0_2-e0_2_0_7-IPC_B 19.75,106 r90 bottom (schematic designator C34)
C34_DES_1 "GRM21BR61E226ME44L" FP-GRM21B-0_2-e0_2_0_7-IPC_B 57.75,106 r90 bottom (schematic designator C34)
C? "100n" FP-0402-L_1_0_0_05-W_0_5-IPC_A 260,198 r0 top
C? "GRM188R60J106ME47D" FP-GRM188-0_1-e0_2_0_55-IPC_A 223,170 r0 top
C? "100n" FP-0402-L_1_0_0_05-W_0_5-IPC_A 273,198 r0 top
C? "100n" FP-0402-L_1_0_0_05-W_0_5-IPC_A 298,198 r0 top
C? "100nF" FP-0402-L_1_0_0_05-W_0_5-IPC_A 441,170 r0 top
C? "GRM188R60J106ME47D" FP-GRM188-0_1-e0_2_0_55-IPC_A 210,5 r0 top
C? "100nF" FP-0402-L_1_0_0_05-W_0_5-IPC_A 406,170 r0 top
C? "C1005X7R1H104K050BB" FP-C1005-050-0_05-IPC_C 217,170 r0 top
C? "100n" FP-0402-L_1_0_0_05-W_0_5-IPC_A 311,198 r0 top
C? "100n" FP-0402-L_1_0_0_05-W_0_5-IPC_A 277,198 r0 top
C? "100n" FP-0402-L_1_0_0_05-W_0_5-IPC_A 336,198 r0 top
C? "100n" FP-0402-L_1_0_0_05-W_0_5-IPC_A 255,198 r0 top
C? "100n" FP-0402-L_1_0_0_05-W_0_5-IPC_A 290,198 r0 top
C? "100n" FP-0402-L_1_0_0_05-W_0_5-IPC_A 286,198 r0 top
C? "100n" FP-0402-L_1_0_0_05-W_0_5-IPC_A 268,198 r0 top
C? "100n" FP-0402-L_1_0_0_05-W_0_5-IPC_A 303,198 r0 top
C? "100n" FP-0402-L_1_0_0_05-W_0_5-IPC_A 281,198 r0 top
C? "C0402C221K5RAC7867" CAPC1005X60X30NL05T10 377,6 r0 top
C? "C1005X7R1H104K050BB" FP-C1005-050-0_05-IPC_C 499.001,5 r0 top
C? "GRM1555C1H120GA01D" FP-GRM155-0_05-MFG 310,5 r0 top
C? "C1005X7R1H104K050BB" FP-C1005-050-0_05-IPC_C 473,5 r0 top
C? "C1005X7R1H104K050BB" FP-C1005-050-0_05-IPC_C 525.001,5 r0 top
C? "C1005X7R1H104K050BB" FP-C1005-050-0_05-IPC_C 482,5 r0 top
C? "C1005X7R1H104K050BB" FP-C1005-050-0_05-IPC_C 205,5 r0 top
C? "C1005X7R1H104K050BB" FP-C1005-050-0_05-IPC_C 430,5 r0 top
C? "C0402C221K5RAC7867" CAPC1005X60X30NL05T10 373,6 r0 top
C? "C1005X7R1H104K050BB" FP-C1005-050-0_05-IPC_C 490.001,5 r0 top
C? "C1005X7R1H104K050BB" FP-C1005-050-0_05-IPC_C 534.001,5 r0 top
C? "C0402C479C5GACTU" FP-C0402-BB-MFG 447,6 r0 top value="4.7 pF"
C? "C1005X7R1H104K050BB" FP-C1005-050-0_05-IPC_C 508.001,5 r0 top
C? "C1005X7R1H104K050BB" FP-C1005-050-0_05-IPC_C 516.001,5 r0 top
C? "C0402C479C5GACTU" FP-C0402-BB-MFG 408,6 r0 top value="4.7 pF"
C? "C1005X7R1H104K050BB" FP-C1005-050-0_05-IPC_C 214,5 r0 top
C? "GRM188R60J106ME47D" FP-GRM188-0_1-e0_2_0_55-IPC_A 224,5 r0 top
C? "100n" FP-0402-L_1_0_0_05-W_0_5-IPC_A 396,223 r0 top
C? "100n" FP-0402-L_1_0_0_05-W_0_5-IPC_A 422,223 r0 top
C? "C1005X7R1H104K050BB" FP-C1005-050-0_05-IPC_C 213,224 r0 top
C? "C1005X7R1H104K050BB" FP-C1005-050-0_05-IPC_C 218,224 r0 top
C? "100n" FP-0402-L_1_0_0_05-W_0_5-IPC_A 427,223 r0 top
C? "GRM188R60J106ME47D" FP-GRM188-0_1-e0_2_0_55-IPC_A 251,223 r0 top
C? "C1005X7R1H104K050BB" FP-C1005-050-0_05-IPC_C 226,224 r0 top
C? "100n" FP-0402-L_1_0_0_05-W_0_5-IPC_A 329,223 r0 top
C? "100n" FP-0402-L_1_0_0_05-W_0_5-IPC_A 187,223 r0 top
C? "C1005X7R1H104K050BB" FP-C1005-050-0_05-IPC_C 201,260 r0 top
C? "T520B337M2R5ATE045" KEMT-520-B-2_M 207,259 r0 top
C? "GRM188R60J106ME47D" FP-GRM188-0_1-e0_2_0_55-IPC_A 241,223 r0 top
C? "100n" FP-0402-L_1_0_0_05-W_0_5-IPC_A 409,223 r0 top
C? "C1005X7R1H104K050BB" FP-C1005-050-0_05-IPC_C 231,224 r0 top
C? "100n" FP-0402-L_1_0_0_05-W_0_5-IPC_A 325,223 r0 top
C? "100n" FP-0402-L_1_0_0_05-W_0_5-IPC_A 307,198 r0 top
C? "100n" FP-0402-L_1_0_0_05-W_0_5-IPC_A 226,198 r0 top
C? "100n" FP-0402-L_1_0_0_05-W_0_5-IPC_A 230,198 r0 top
C? "100n" FP-0402-L_1_0_0_05-W_0_5-IPC_A 222,198 r0 top
C? "100n" FP-0402-L_1_0_0_05-W_0_5-IPC_A 251,198 r0 top
C? "100n" FP-0402-L_1_0_0_05-W_0_5-IPC_A 264,198 r0 top
C? "100n" FP-0402-L_1_0_0_05-W_0_5-IPC_A 332,198 r0 top
C? "100n" FP-0402-L_1_0_0_05-W_0_5-IPC_A 294,198 r0 top
C? "C1005X7R1H104K050BB" FP-C1005-050-0_05-IPC_C 235,224 r0 top
C? "100n" FP-0402-L_1_0_0_05-W_0_5-IPC_A 414,223 r0 top
C? "C1005X7R1H104K050BB" FP-C1005-050-0_05-IPC_C 222,224 r0 top
C? "GRM188R60J106ME47D" FP-GRM188-0_1-e0_2_0_55-IPC_A 246,223 r0 top
C? "100n" FP-0402-L_1_0_0_05-W_0_5-IPC_A 405,223 r0 top
C? "100n" FP-0402-L_1_0_0_05-W_0_5-IPC_A 418,223 r0 top
C? "100n" FP-0402-L_1_0_0_05-W_0_5-IPC_A 401,223 r0 top
C?_FAN_IF_0 "C1005X7R1H104K050BB" FP-C1005-050-0_05-IPC_C 414,307 r90 top (schematic designator C?)
C?_FAN_IF_0 "C1005X7R1H104K050BB" FP-C1005-050-0_05-IPC_C 396,307 r90 top (schematic designator C?)
C?_FAN_IF_1 "C1005X7R1H104K050BB" FP-C1005-050-0_05-IPC_C 407,321 r90 top (schematic designator C?)
C?_FAN_IF_1 "C1005X7R1H104K050BB" FP-C1005-050-0_05-IPC_C 390,321 r90 top (schematic designator C?)
D1_DES_0 "ESD204DQAR" FP-DQA0010A-MFG 25.5,112 r180 bottom value=0.55pF (schematic designator D1)
D1_DES_1 "ESD204DQAR" FP-DQA0010A-MFG 63.5,112 r180 bottom value=0.55pF (schematic designator D1)
D2_DES_0 "ESD204DQAR" FP-DQA0010A-MFG 16.5,112 r0 bottom value=0.55pF (schematic designator D2)
D2_DES_1 "ESD204DQAR" FP-DQA0010A-MFG 54.5,112 r0 bottom value=0.55pF (schematic designator D2)
D? "ESD204DQAR" FP-DQA0010A-MFG 398,169 r0 top value=0.55pF
D? "ESD204DQAR" FP-DQA0010A-MFG 429,169 r0 top value=0.55pF
D? "ESD204DQAR" FP-DQA0010A-MFG 425,169 r0 top value=0.55pF
D? "ESD204DQAR or PUSB3AB4Z" FP-DQA0010A-MFG 359,169 r0 top value=0.55pF
D? "ESD204DQAR or PUSB3AB4Z" FP-DQA0010A-MFG 368,169 r0 top value=0.55pF
D? "ESD204DQAR or PUSB3AB4Z" FP-DQA0010A-MFG 346,169 r0 top value=0.55pF
D? "ESD204DQAR" FP-DQA0010A-MFG 376,169 r0 top value=0.55pF
D? "ESD204DQAR or PUSB3AB4Z" FP-DQA0010A-MFG 435,5 r0 top value=0.55pF
D? "BAT54CWT1G" ONSC-SOT-323-3-419-04_V 272,4 r0 top
D? "ESD204DQAR or PUSB3AB4Z" FP-DQA0010A-MFG 470,5 r0 top value=0.55pF
D? "ESD204DQAR or PUSB3AB4Z" FP-DQA0010A-MFG 342,169 r0 top value=0.55pF
D? "ESD204DQAR or PUSB3AB4Z" FP-DQA0010A-MFG 438,169 r0 top value=0.55pF
D? "ESD204DQAR or PUSB3AB4Z" FP-DQA0010A-MFG 405,5 r0 top value=0.55pF
D? "ESD204DQAR" FP-DQA0010A-MFG 433,169 r0 top value=0.55pF
D? "ESD204DQAR or PUSB3AB4Z" FP-DQA0010A-MFG 381,169 r0 top value=0.55pF
D? "ESD204DQAR or PUSB3AB4Z" FP-DQA0010A-MFG 333,169 r0 top value=0.55pF
D? "150066RG54050" WL-SBCD_0606 277,223 r0 top
D? "ESD204DQAR" FP-DQA0010A-MFG 402,169 r0 top value=0.55pF
D? "ESD204DQAR or PUSB3AB4Z" FP-DQA0010A-MFG 338,169 r0 top value=0.55pF
D? "ESD204DQAR or PUSB3AB4Z" FP-DQA0010A-MFG 420,169 r0 top value=0.55pF
D? "ESD204DQAR or PUSB3AB4Z" FP-DQA0010A-MFG 355,169 r0 top value=0.55pF
D? "ESD204DQAR" FP-DQA0010A-MFG 372,169 r0 top value=0.55pF
D? "ESD204DQAR or PUSB3AB4Z" FP-DQA0010A-MFG 389,169 r0 top value=0.55pF
D? "ESD204DQAR" FP-DQA0010A-MFG 394,169 r0 top value=0.55pF
D? "ESD204DQAR or PUSB3AB4Z" FP-DQA0010A-MFG 363,169 r0 top value=0.55pF
D? "ESD204DQAR or PUSB3AB4Z" FP-DQA0010A-MFG 351,169 r0 top value=0.55pF
Designator5 "Comment" FP-776163-1-MFG 135,119 r180 top
Designator23 "Comment" ARJ-196-Footprint-1 209.06,146.35 r180 top
Designator25 "Comment" FP-99S23F-40MA5-Z-MFG 86.25,113.1 r0 top
F1_DES_0 "SF-1206FP200-2" FP-SF-1206FP-MFG 25,104.75 r0 top (schematic designator F1)
F1_DES_1 "SF-1206FP200-2" FP-SF-1206FP-MFG 63,104.75 r0 top (schematic designator F1)
F2_DES_0 "SF-1206FP200-2" FP-SF-1206FP-MFG 25,101 r0 top (schematic designator F2)
F2_DES_1 "SF-1206FP200-2" FP-SF-1206FP-MFG 63,101 r0 top (schematic designator F2)
F3_DES_0 "SF-1206FP200-2" FP-SF-1206FP-MFG 17,104.75 r180 top (schematic designator F3)
F3_DES_1 "SF-1206FP200-2" FP-SF-1206FP-MFG 55,104.75 r180 top (schematic designator F3)
F4_DES_0 "SF-1206FP200-2" FP-SF-1206FP-MFG 17,101 r180 top (schematic designator F4)
F4_DES_1 "SF-1206FP200-2" FP-SF-1206FP-MFG 55,101 r180 top (schematic designator F4)
F5_DES_0 "SF-1206FP200-2" FP-SF-1206FP-MFG 34,85.5 r180 top (schematic designator F5)
F5_DES_1 "SF-1206FP200-2" FP-SF-1206FP-MFG 72,85.5 r180 top (schematic designator F5)
F?_FAN_IF_0 "2920L050DR" FP-2920L050DR-MFG 451,305 r90 top (schematic designator F?)
F?_FAN_IF_1 "2920L050DR" FP-2920L050DR-MFG 444,319 r90 top (schematic designator F?)
FB? "BLM15PX601SN1D" FP-BLM15-0_05-MFG 367,5 r90 top
FB? "BLM15PX601SN1D" FP-BLM15-0_05-MFG 357,5 r90 top
FB? "BLM15PX601SN1D" FP-BLM15-0_05-MFG 255,5 r90 top
FB? "BLM15PX601SN1D" FP-BLM15-0_05-MFG 289,5 r90 top
FB? "BLM15PX601SN1D" FP-BLM15-0_05-MFG 266,5 r90 top
FB? "BLM15PX601SN1D" FP-BLM15-0_05-MFG 328,5 r90 top
FB? "BLM15PX601SN1D" FP-BLM15-0_05-MFG 304,5 r90 top
FB? "BLM15PX601SN1D" FP-BLM15-0_05-MFG 338,5 r90 top
J1 "FM4-NZRP-PCB-1" FM4-NZRP-PCB-1-Footprint-1 21,112 r90 top
J2 "FM4-NZRP-PCB-1" FM4-NZRP-PCB-1-Footprint-1 59,112 r90 top
J3 "776087-1" FP-776087-1-MFG 142,202 r180 top (schematic designator J1)
J4 "FA1-NDRP-PCB-8" FA1-NDRP-PCB-8-Footprint-1 90.54,152.46 r0 top
J? "2309413-1" FP-2309413-1-MFG 433,48 r90 top
J? "2309413-1" FP-2309413-1-MFG 377,48 r90 top
J? "2309413-1" FP-2309413-1-MFG 405,48 r90 top
J? "47659-1102" FP-47659-1102-MFG 195,191 r90 top
J? "2309413-1" FP-2309413-1-MFG 321,48 r90 top
J? "2309413-1" FP-2309413-1-MFG 349,48 r90 top
J? "TSW-102-07-L-S" FP-TSW-102-07-L-S-MFG 301,168 r90 top
J? "2309413-1" FP-2309413-1-MFG 488.001,48 r90 top
J? "2309413-1" FP-2309413-1-MFG 461,48 r90 top
J? "2309413-1" FP-2309413-1-MFG 45.625,67.1 r0 bottom
J? "QTH-020-02-L-D-DP-A-K" QTH-020-02-L-D-DP-A-K-Footprint-1 205,189 r90 top
J? "105133-0001" MOLX-105133-0001_V 214,257 r90 top
J? "1-2199230-6" FP-1-2199230-6-MFG 353.35,190 r90 top
J? "2199230-4" FP-2199230-4-MFG 20.9,36.25 r270 bottom
J? "2199230-4" FP-2199230-4-MFG 206,238 r90 top
J? "1-2199230-6" FP-1-2199230-6-MFG 389,213 r90 top
J? "HTSW-104-07-G-S" FP-HTSW-104-07-G-S-MFG 188,194 r90 top
J? "1-2199230-6" FP-1-2199230-6-MFG 378,213 r90 top
J? "1-2199230-6" FP-1-2199230-6-MFG 367,213 r90 top
J?_FAN_IF_0 "47053-1000" FP-470531000-MFG 256,303 r90 top (schematic designator J?)
J?_FAN_IF_1 "47053-1000" FP-470531000-MFG 254,318 r90 top (schematic designator J?)
L1_DES_0 "744066101" WE-TPC_1038 34,112 r90 top (schematic designator L1)
L1_DES_1 "744066101" WE-TPC_1038 72,112 r90 top (schematic designator L1)
L2_DES_0 "ADL32VHC-220M" FP-1210POC-MFG 31.5,116.5 r180 bottom value=22uH (schematic designator L2)
L2_DES_1 "ADL32VHC-220M" FP-1210POC-MFG 69.5,116.5 r180 bottom value=22uH (schematic designator L2)
L3_DES_0 "PFL1609-561MEW" FP-PFL1609-MFG 28.5,113.75 r270 bottom value=0.56uH (schematic designator L3)
L3_DES_1 "PFL1609-561MEW" FP-PFL1609-MFG 66.5,113.75 r270 bottom value=0.56uH (schematic designator L3)
L4_DES_0 "744066101" WE-TPC_1038 34,101 r270 top (schematic designator L4)
L4_DES_1 "744066101" WE-TPC_1038 72,101 r270 top (schematic designator L4)
L5_DES_0 "ADL32VHC-220M" FP-1210POC-MFG 25.5,105 r0 bottom value=22uH (schematic designator L5)
L5_DES_1 "ADL32VHC-220M" FP-1210POC-MFG 63.5,105 r0 bottom value=22uH (schematic designator L5)
L6_DES_0 "PFL1609-561MEW" FP-PFL1609-MFG 28.5,110.25 r90 bottom value=0.56uH (schematic designator L6)
L6_DES_1 "PFL1609-561MEW" FP-PFL1609-MFG 66.5,110.25 r90 bottom value=0.56uH (schematic designator L6)
L7_DES_0 "744066101" WE-TPC_1038 8,112 r270 top (schematic designator L7)
L7_DES_1 "744066101" WE-TPC_1038 46,112 r270 top (schematic designator L7)
L8_DES_0 "ADL32VHC-220M" FP-1210POC-MFG 10.5,116.5 r180 bottom value=22uH (schematic designator L8)
L8_DES_1 "ADL32VHC-220M" FP-1210POC-MFG 48.5,116.5 r180 bottom value=22uH (schematic designator L8)
L9_DES_0 "PFL1609-561MEW" FP-PFL1609-MFG 13.5,113.75 r270 bottom value=0.56uH (schematic designator L9)
L9_DES_1 "PFL1609-561MEW" FP-PFL1609-MFG 51.5,113.75 r270 bottom value=0.56uH (schematic designator L9)
L10_DES_0 "744066101" WE-TPC_1038 8,101 r90 top (schematic designator L10)
L10_DES_1 "744066101" WE-TPC_1038 46,101 r90 top (schematic designator L10)
L11_DES_0 "ADL32VHC-220M" FP-1210POC-MFG 16.5,105 r180 bottom value=22uH (schematic designator L11)
L11_DES_1 "ADL32VHC-220M" FP-1210POC-MFG 54.5,105 r180 bottom value=22uH (schematic designator L11)
L12_DES_0 "PFL1609-561MEW" FP-PFL1609-MFG 13.5,110.25 r90 bottom value=0.56uH (schematic designator L12)
L12_DES_1 "PFL1609-561MEW" FP-PFL1609-MFG 51.5,110.25 r90 bottom value=0.56uH (schematic designator L12)
MP? "9774025243R" 9774025243 213,86 r0 top
MP? "9774025243R" 9774025243 220,86 r0 top
MP? "9774025243R" 9774025243 185,247 r0 top
MP? "9774025243R" 9774025243 257,221 r0 top
Q? "BSS138W-7-F" DIOD-SOT323-3_V 227,169 r0 top
Q? "BSS138W-7-F" DIOD-SOT323-3_V 273,169 r0 top
Q? "BSS138W-7-F" DIOD-SOT323-3_V 188,259 r0 top
Q? "BSS138W-7-F" DIOD-SOT323-3_V 247,87 r0 top
Q? "SSM6N7002KFU,LF" FP-SSOP6-P-0_65A-MFG 198,87 r0 top
Q? "BSS138W-7-F" DIOD-SOT323-3_V 201,169 r0 top
Q? "BSS138W-7-F" DIOD-SOT323-3_V 183,169 r0 top
Q? "BSS138W-7-F" DIOD-SOT323-3_V 264,87 r0 top
Q? "BSS138W-7-F" DIOD-SOT323-3_V 256,169 r0 top
Q? "SSM6N7002KFU,LF" FP-SSOP6-P-0_65A-MFG 193,87 r0 top
Q? "BSS138W-7-F" DIOD-SOT323-3_V 413,4 r0 top
Q? "BSS138W-7-F" DIOD-SOT323-3_V 452,4 r0 top
Q? "BSS138W-7-F" DIOD-SOT323-3_V 315,4 r0 top
Q? "BSS138W-7-F" DIOD-SOT323-3_V 234,4 r0 top
Q? "BSS138W-7-F" DIOD-SOT323-3_V 400,4 r0 top
Q?_FAN_IF_0 "BSS138W-7-F" DIOD-SOT323-3_V 201,308 r90 top (schematic designator Q?)
Q?_FAN_IF_0 "BSS138W-7-F" DIOD-SOT323-3_V 308,308 r90 top (schematic designator Q?)
Q?_FAN_IF_1 "BSS138W-7-F" DIOD-SOT323-3_V 304,322 r90 top (schematic designator Q?)
Q?_FAN_IF_1 "BSS138W-7-F" DIOD-SOT323-3_V 201,322 r90 top (schematic designator Q?)
Q?_RAIL_DISCH_0 "SSM6N7002KFU,LF" FP-SSOP6-P-0_65A-MFG 183,334 r90 top (schematic designator Q?)
Q?_RAIL_DISCH_0 "SSM6N7002KFU,LF" FP-SSOP6-P-0_65A-MFG 207,334 r90 top (schematic designator Q?)
Q?_RAIL_DISCH_1 "SSM6N7002KFU,LF" FP-SSOP6-P-0_65A-MFG 183,349 r90 top (schematic designator Q?)
Q?_RAIL_DISCH_1 "SSM6N7002KFU,LF" FP-SSOP6-P-0_65A-MFG 206,349 r90 top (schematic designator Q?)
Q?_RAIL_DISCH_2 "SSM6N7002KFU,LF" FP-SSOP6-P-0_65A-MFG 183,364 r90 top (schematic designator Q?)
Q?_RAIL_DISCH_2 "SSM6N7002KFU,LF" FP-SSOP6-P-0_65A-MFG 207,364 r90 top (schematic designator Q?)
R1_DES_0 "402" R0603B 25,99 r180 top (schematic designator R1)
R1_DES_1 "402" R0603B 63,99 r180 top (schematic designator R1)
R2_DES_0 "10k" R0603B 17,99 r180 top (schematic designator R2)
R2_DES_1 "10k" R0603B 55,99 r180 top (schematic designator R2)
R3_DES_0 "49.9" R0603B 29.621,98.121 r225 bottom (schematic designator R3)
R3_DES_1 "49.9" R0603B 67.621,98.121 r225 bottom (schematic designator R3)
R4_DES_0 "49.9" R0603B 27.621,100.121 r225 bottom (schematic designator R4)
R4_DES_1 "49.9" R0603B 65.621,100.121 r225 bottom (schematic designator R4)
R5_DES_0 "DNP" R0603B 32,92.5 r270 bottom (schematic designator R5)
R5_DES_1 "DNP" R0603B 70,92.5 r270 bottom (schematic designator R5)
R6_DES_0 "DNP" R0603B 10,92.5 r90 bottom (schematic designator R6)
R6_DES_1 "DNP" R0603B 48,92.5 r90 bottom (schematic designator R6)
R7_DES_0 "10k" R0603B 30,92.5 r90 bottom (schematic designator R7)
R7_DES_1 "10k" R0603B 68,92.5 r90 bottom (schematic designator R7)
R8_DES_0 "10k" R0603B 12,92.5 r90 bottom (schematic designator R8)
R8_DES_1 "10k" R0603B 50,92.5 r90 bottom (schematic designator R8)
R9_DES_0 "49.9" R0603B 14.379,100.121 r315 bottom (schematic designator R9)
R9_DES_1 "49.9" R0603B 52.379,100.121 r315 bottom (schematic designator R9)
R10_DES_0 "49.9" R0603B 12.379,98.121 r315 bottom (schematic designator R10)
R10_DES_1 "49.9" R0603B 50.379,98.121 r315 bottom (schematic designator R10)
R11_DES_0 "120" R0603B 16.75,89.25 r180 top (schematic designator R11)
R11_DES_1 "120" R0603B 54.75,89.25 r180 top (schematic designator R11)
R12_DES_0 "5.1k" R0603B 28.5,116.5 r90 bottom (schematic designator R12)
R12_DES_1 "5.1k" R0603B 66.5,116.5 r90 bottom (schematic designator R12)
R13_DES_0 "5.1k" R0603B 28.5,107.5 r270 bottom (schematic designator R13)
R13_DES_1 "5.1k" R0603B 66.5,107.5 r270 bottom (schematic designator R13)
R14_DES_0 "5.1k" R0603B 13.5,116.5 r90 bottom (schematic designator R14)
R14_DES_1 "5.1k" R0603B 51.5,116.5 r90 bottom (schematic designator R14)
R15_DES_0 "5.1k" R0603B 13.5,107.5 r270 bottom (schematic designator R15)
R15_DES_1 "5.1k" R0603B 51.5,107.5 r270 bottom (schematic designator R15)
R? "ERJ3EKF1002V" RESC1609X55X30LL15T15 260,88 r0 top
R? "ERJ-3EKF1001V" RESC1608X55X30LL15T15 251,88 r0 top
R? "ERJ-2RKF4990X" FP-ERJ2RK-MFG 363,6 r0 top
R? "ERJ-2RKF4990X" FP-ERJ2RK-MFG 319,6 r0 top
R? "0402 JUMPER" RESC1005X40X25ML05T05 238,88 r0 top
R? "ERJ3EKF1002V" RESC1609X55X30LL15T15 251,170 r0 top
R? "ERJ-3EKF1001V" RESC1608X55X30LL15T15 202,88 r0 top
R? "ERJ3EKF1002V" RESC1609X55X30LL15T15 192,170 r0 top
R? "ERJ-3EKF1003V" RESC1608X55X30ML15T15 229,5 r0 top
R? "ERJ-2RKF4990X" FP-ERJ2RK-MFG 251,6 r0 top
R? "ERJ-3EKF1003V" RESC1608X55X30ML15T15 277,5 r0 top
R? "0402 JUMPER" RESC1005X40X25ML05T05 183,6 r0 top
R? "ERJ3EKF1801V" RESC1608X55X30LL15T15 426,6 r0 top
R? "0402 JUMPER" RESC1005X40X25ML05T05 247,6 r0 top
R? "ERJ-3EKF3242V" FP-ERJ3EK-MFG 285,6 r0 top
R? "0402 JUMPER" RESC1005X40X25ML05T05 530.001,6 r0 top
R? "ERJ3EKF1002V" RESC1609X55X30LL15T15 213,170 r0 top
R? "0402 JUMPER" RESC1005X40X25ML05T05 225,88 r0 top
R? "ERJ-3EKF1003V" RESC1608X55X30ML15T15 183,87 r0 top
R? "ERJ-3EKF1003V" RESC1608X55X30ML15T15 329,170 r0 top
R? "ERJ3EKF1002V" RESC1609X55X30LL15T15 277,88 r0 top
R? "ERJ3EKF1002V" RESC1609X55X30LL15T15 196,170 r0 top
R? "ERJ3EKF1002V" RESC1609X55X30LL15T15 255,88 r0 top
R? "ERJ-3EKF1003V" RESC1608X55X30ML15T15 290,170 r0 top
R? "ERJ-3EKF1001V" RESC1608X55X30LL15T15 277,170 r0 top
R? "ERJ3EKF1002V" RESC1609X55X30LL15T15 273,88 r0 top
R? "ERJ-3EKF1003V" RESC1608X55X30ML15T15 188,87 r0 top
R? "ERJ-3EKF1001V" RESC1608X55X30LL15T15 268,88 r0 top
R? "ERJ3EKF1002V" RESC1609X55X30LL15T15 385,170 r0 top
R? "0402 JUMPER" RESC1005X40X25ML05T05 234,88 r0 top
R? "ERJ3EKF1002V" RESC1609X55X30LL15T15 209,170 r0 top
R? "0402 JUMPER" RESC1005X40X25ML05T05 242,88 r0 top
R? "ERJ-2RKF4990X" FP-ERJ2RK-MFG 262,6 r0 top
R? "0402 JUMPER" RESC1005X40X25ML05T05 521.001,6 r0 top
R? "0402 JUMPER" RESC1005X40X25ML05T05 391,6 r0 top
R? "ERJ3EKF1002V" RESC1609X55X30LL15T15 461,6 r0 top
R? "ERJ-2RKF4990X" FP-ERJ2RK-MFG 353,6 r0 top
R? "ERJ3EKF1002V" RESC1609X55X30LL15T15 422,6 r0 top
R? "ERJ-3EKF1623V" RESC1608X55X30ML15T15 345,5 r0 top
R? "ERJ-3EKF1003V" RESC1608X55X30ML15T15 396,5 r0 top
R? "0402 JUMPER" RESC1005X40X25ML05T05 349,6 r0 top
R? "0402 JUMPER" RESC1005X40X25ML05T05 192,6 r0 top
R? "0402 JUMPER" RESC1005X40X25ML05T05 417,6 r0 top
R? "ERJ3EKF1002V" RESC1609X55X30LL15T15 382,6 r0 top
R? "0402 JUMPER" RESC1005X40X25ML05T05 478,6 r0 top
R? "0402 JUMPER" RESC1005X40X25ML05T05 196,6 r0 top
R? "0402 JUMPER" RESC1005X40X25ML05T05 538.001,6 r0 top
R? "0402 JUMPER" RESC1005X40X25ML05T05 456,6 r0 top
R? "0402 JUMPER" RESC1005X40X25ML05T05 439,6 r0 top
R? "0402 JUMPER" RESC1005X40X25ML05T05 486.001,6 r0 top
R? "0402 JUMPER" RESC1005X40X25ML05T05 504.001,6 r0 top
R? "ERJ-3EKF1001V" RESC1608X55X30LL15T15 201,6 r0 top
R? "ERJ-3EKF1003V" RESC1608X55X30ML15T15 188,5 r0 top
R? "0402 JUMPER" RESC1005X40X25ML05T05 512.001,6 r0 top
R? "ERJ-3EKF1003V" RESC1608X55X30ML15T15 243,5 r0 top
R? "ERJ-2RKF4990X" FP-ERJ2RK-MFG 300,6 r0 top
R? "0402 JUMPER" RESC1005X40X25ML05T05 443,6 r0 top
R? "ERJ3EKF1801V" RESC1608X55X30LL15T15 465,6 r0 top
R? "0402 JUMPER" RESC1005X40X25ML05T05 324,6 r0 top
R? "ERJ-3EKF1003V" RESC1608X55X30ML15T15 387,5 r0 top
R? "ERJ-2RKF4990X" FP-ERJ2RK-MFG 281,6 r0 top
R? "ERJ-2RKF4990X" FP-ERJ2RK-MFG 334,6 r0 top
R? "ERJ3EKF1002V" RESC1609X55X30LL15T15 219,6 r0 top
R? "0402 JUMPER" RESC1005X40X25ML05T05 495.001,6 r0 top
R? "ERJ-3EKF1001V" RESC1608X55X30LL15T15 205,170 r0 top
R? "0402 JUMPER" RESC1005X40X25ML05T05 316,224 r0 top
R? "ERJ-3EKF1200V" RESC1609X55X30ML15T15 273,223 r0 top
R? "0402 JUMPER" RESC1005X40X25ML05T05 307,224 r0 top
R? "ERJ3EKF1002V" RESC1609X55X30LL15T15 282,224 r0 top
R? "0402 JUMPER" RESC1005X40X25ML05T05 200,224 r0 top
R? "ERJ-3EKF33R0V" FP-ERJ3EK-MFG 321,224 r0 top
R? "0402 JUMPER" RESC1005X40X25ML05T05 204,224 r0 top
R? "0402 JUMPER" RESC1005X40X25ML05T05 299,224 r0 top
R? "0402 JUMPER" RESC1005X40X25ML05T05 183,224 r0 top
R? "ERJ-3EKF1003V" RESC1608X55X30ML15T15 183,260 r0 top
R? "0402 JUMPER" RESC1005X40X25ML05T05 312,224 r0 top
R? "ERJ-3EKF1003V" RESC1608X55X30ML15T15 197,260 r0 top
R? "0402 JUMPER" RESC1005X40X25ML05T05 192,260 r0 top
R? "0402 JUMPER" RESC1005X40X25ML05T05 262,224 r0 top
R? "0402 JUMPER" RESC1005X40X25ML05T05 303,224 r0 top
R? "0402 JUMPER" RESC1005X40X25ML05T05 196,224 r0 top
R? "ERJ-3EKF1200V" RESC1609X55X30ML15T15 268,223 r0 top
R? "ERJ3EKF1002V" RESC1609X55X30LL15T15 451,170 r0 top
R? "ERJ3EKF1002V" RESC1609X55X30LL15T15 286,170 r0 top
R? "ERJ3EKF1002V" RESC1609X55X30LL15T15 416,170 r0 top
R? "0402 JUMPER" RESC1005X40X25ML05T05 229,88 r0 top
R? "ERJ-3EKF1001V" RESC1608X55X30LL15T15 260,170 r0 top
R? "ERJ3EKF1002V" RESC1609X55X30LL15T15 281,170 r0 top
R? "ERJ-3EKF1001V" RESC1608X55X30LL15T15 187,170 r0 top
R? "ERJ-3EKF1001V" RESC1608X55X30LL15T15 231,170 r0 top
R? "ERJ3EKF1002V" RESC1609X55X30LL15T15 247,170 r0 top
R? "ERJ3EKF1002V" RESC1609X55X30LL15T15 295,224 r0 top
R? "0402 JUMPER" RESC1005X40X25ML05T05 286,224 r0 top
R? "0402 JUMPER" RESC1005X40X25ML05T05 191,224 r0 top
R? "0402 JUMPER" RESC1005X40X25ML05T05 290,224 r0 top
R? "ERJ3EKF1002V" RESC1609X55X30LL15T15 268,170 r0 top
R? "ERJ3EKF1002V" RESC1609X55X30LL15T15 264,170 r0 top
R? "ERJ-3EKF1001V" RESC1608X55X30LL15T15 183,198 r0 top
R? "ERJ-3EKF1001V" RESC1608X55X30LL15T15 207,88 r0 top
R?_FAN_IF_0 "ERJ-3EKF1001V" RESC1608X55X30LL15T15 378,308 r90 top (schematic designator R?)
R?_FAN_IF_0 "0402 JUMPER" RESC1005X40X25ML05T05 502.001,308 r90 top (schematic designator R?)
R?_FAN_IF_0 "ERJ3EKF1002V" RESC1609X55X30LL15T15 325,308 r90 top (schematic designator R?)
R?_FAN_IF_0 "ERJ-3EKF1003V" RESC1608X55X30ML15T15 343,308 r90 top (schematic designator R?)
R?_FAN_IF_0 "0402 JUMPER" RESC1005X40X25ML05T05 520.001,308 r90 top (schematic designator R?)
R?_FAN_IF_0 "ERJ-3EKF1003V" RESC1608X55X30ML15T15 432,308 r90 top (schematic designator R?)
R?_FAN_IF_0 "ERJ3EKF1002V" RESC1609X55X30LL15T15 182,308 r90 top (schematic designator R?)
R?_FAN_IF_0 "JUMP" RESC1005X40X25ML05T05 360,308 r90 top (schematic designator R?)
R?_FAN_IF_0 "ERJ3EKF1002V" RESC1609X55X30LL15T15 289,308 r90 top (schematic designator R?)
R?_FAN_IF_0 "ERJ-3EKF1001V" RESC1608X55X30LL15T15 218,308 r90 top (schematic designator R?)
R?_FAN_IF_0 "ERJ-3EKF1001V" RESC1608X55X30LL15T15 271,308 r90 top (schematic designator R?)
R?_FAN_IF_0 "ERJ3EKF1002V" RESC1609X55X30LL15T15 236,308 r90 top (schematic designator R?)
R?_FAN_IF_1 "0402 JUMPER" RESC1005X40X25ML05T05 493.001,323 r90 top (schematic designator R?)
R?_FAN_IF_1 "ERJ3EKF1002V" RESC1609X55X30LL15T15 286,322 r90 top (schematic designator R?)
R?_FAN_IF_1 "0402 JUMPER" RESC1005X40X25ML05T05 511.001,323 r90 top (schematic designator R?)
R?_FAN_IF_1 "ERJ-3EKF1001V" RESC1608X55X30LL15T15 372,323 r90 top (schematic designator R?)
R?_FAN_IF_1 "ERJ-3EKF1003V" RESC1608X55X30ML15T15 425,322 r90 top (schematic designator R?)
R?_FAN_IF_1 "ERJ3EKF1002V" RESC1609X55X30LL15T15 182,322 r90 top (schematic designator R?)
R?_FAN_IF_1 "JUMP" RESC1005X40X25ML05T05 355,323 r90 top (schematic designator R?)
R?_FAN_IF_1 "ERJ-3EKF1003V" RESC1608X55X30ML15T15 338,322 r90 top (schematic designator R?)
R?_FAN_IF_1 "ERJ3EKF1002V" RESC1609X55X30LL15T15 321,322 r90 top (schematic designator R?)
R?_FAN_IF_1 "ERJ3EKF1002V" RESC1609X55X30LL15T15 234,322 r90 top (schematic designator R?)
R?_FAN_IF_1 "ERJ-3EKF1001V" RESC1608X55X30LL15T15 217,323 r90 top (schematic designator R?)
R?_FAN_IF_1 "ERJ-3EKF1001V" RESC1608X55X30LL15T15 269,323 r90 top (schematic designator R?)
R?_RAIL_DISCH_0 "ERJ-3RQF5R6V" RESC1608X55X30LL15T15 253,338 r90 top (schematic designator R?)
R?_RAIL_DISCH_0 "ERJ-3EKF1003V" RESC1608X55X30ML15T15 230,337 r90 top (schematic designator R?)
R?_RAIL_DISCH_1 "ERJ-3RQF5R6V" RESC1608X55X30LL15T15 252,353 r90 top (schematic designator R?)
R?_RAIL_DISCH_1 "ERJ-3EKF1003V" RESC1608X55X30ML15T15 229,353 r90 top (schematic designator R?)
R?_RAIL_DISCH_2 "ERJ-3EKF1003V" RESC1608X55X30ML15T15 230,368 r90 top (schematic designator R?)
R?_RAIL_DISCH_2 "ERJ-3RQF5R6V" RESC1608X55X30LL15T15 253,368 r90 top (schematic designator R?)
TP? "TPAD6R" "New footprint 1" 304,170 r90 top
TP? "TPAD6R" "New footprint 1" 310,170 r90 top
TP? "TPAD6R" "New footprint 1" 322,170 r90 top
TP? "TPAD6R" "New footprint 1" 316,170 r90 top
TP? "TPAD6R" "New footprint 1" 333,224 r90 top
TP? "TPAD6R" "New footprint 1" 339,224 r90 top
TP? "TPAD6R" "New footprint 1" 294,170 r90 top
TP? "TPAD6R" "New footprint 1" 344,224 r90 top
U1_DES_0 "MAX96724FGTN/V+" MAX96724FGTN_V+-Footprint-1 21,91.5 r315 bottom (schematic designator U1)
U1_DES_1 "MAX96724FGTN/V+" MAX96724FGTN_V+-Footprint-1 59,91.5 r315 bottom (schematic designator U1)
U2_DES_0 "LD1117S18TR" SOT-223_M 34,91 r0 top (schematic designator U2)
U2_DES_1 "LD1117S18TR" SOT-223_M 72,91 r0 top (schematic designator U2)
U3_DES_0 "LD1117S12TR" SOT-223_M 8,91 r180 top (schematic designator U3)
U3_DES_1 "LD1117S12TR" SOT-223_M 46,91 r180 top (schematic designator U3)
U? "SN74LVC1G07DCKR" FP-DCK0005A-IPC_C 447,169 r0 top
U? "SN74LVC1G07DCKR" FP-DCK0005A-IPC_C 412,169 r0 top
U? "SI1869DH-T1-E3" SOT65P242X110-6N 238,4 r0 top
U? "SI1869DH-T1-E3" SOT65P242X110-6N 296,4 r0 top
U? "LD1117S18TR" SOT-223_M 239,167 r0 top
U?_FAN_IF_0 "SI1869DH-T1-E3" SOT65P242X110-6N 486.001,308 r90 top (schematic designator U?)
U?_FAN_IF_0 "L78M12CDT-TR" TO-252_L 470,304 r90 top (schematic designator U?)
U?_FAN_IF_1 "SI1869DH-T1-E3" SOT65P242X110-6N 477,322 r90 top (schematic designator U?)
U?_FAN_IF_1 "L78M12CDT-TR" TO-252_L 462,318 r90 top (schematic designator U?)
Y1_DES_0 "ABM8G-25.000MHZ-18-D2Y-T" FP-ABM8G-MFG 21,100.5 r0 bottom (schematic designator Y1)
Y1_DES_1 "ABM8G-25.000MHZ-18-D2Y-T" FP-ABM8G-MFG 59,100.5 r0 bottom (schematic designator Y1)
Y? "ASDK-32.768KHZ-LRT" FP-ASDK-MFG 209,223 r0 top